# Altium PCB IQDemod.PcbDoc (part 2 of 2)
Units mm, origin at the board's own origin, x right, y up, seen from the top; angles counter-clockwise.
Board outline 91.45 x 68.67 mm, 4 copper layers (Top Layer, Layer 1, Layer 2, Bottom Layer), stack 1.586 mm thick; 81 components, 32 nets, 226 pads, 413 vias.
Unrouted connection lines stored in the file: 58.
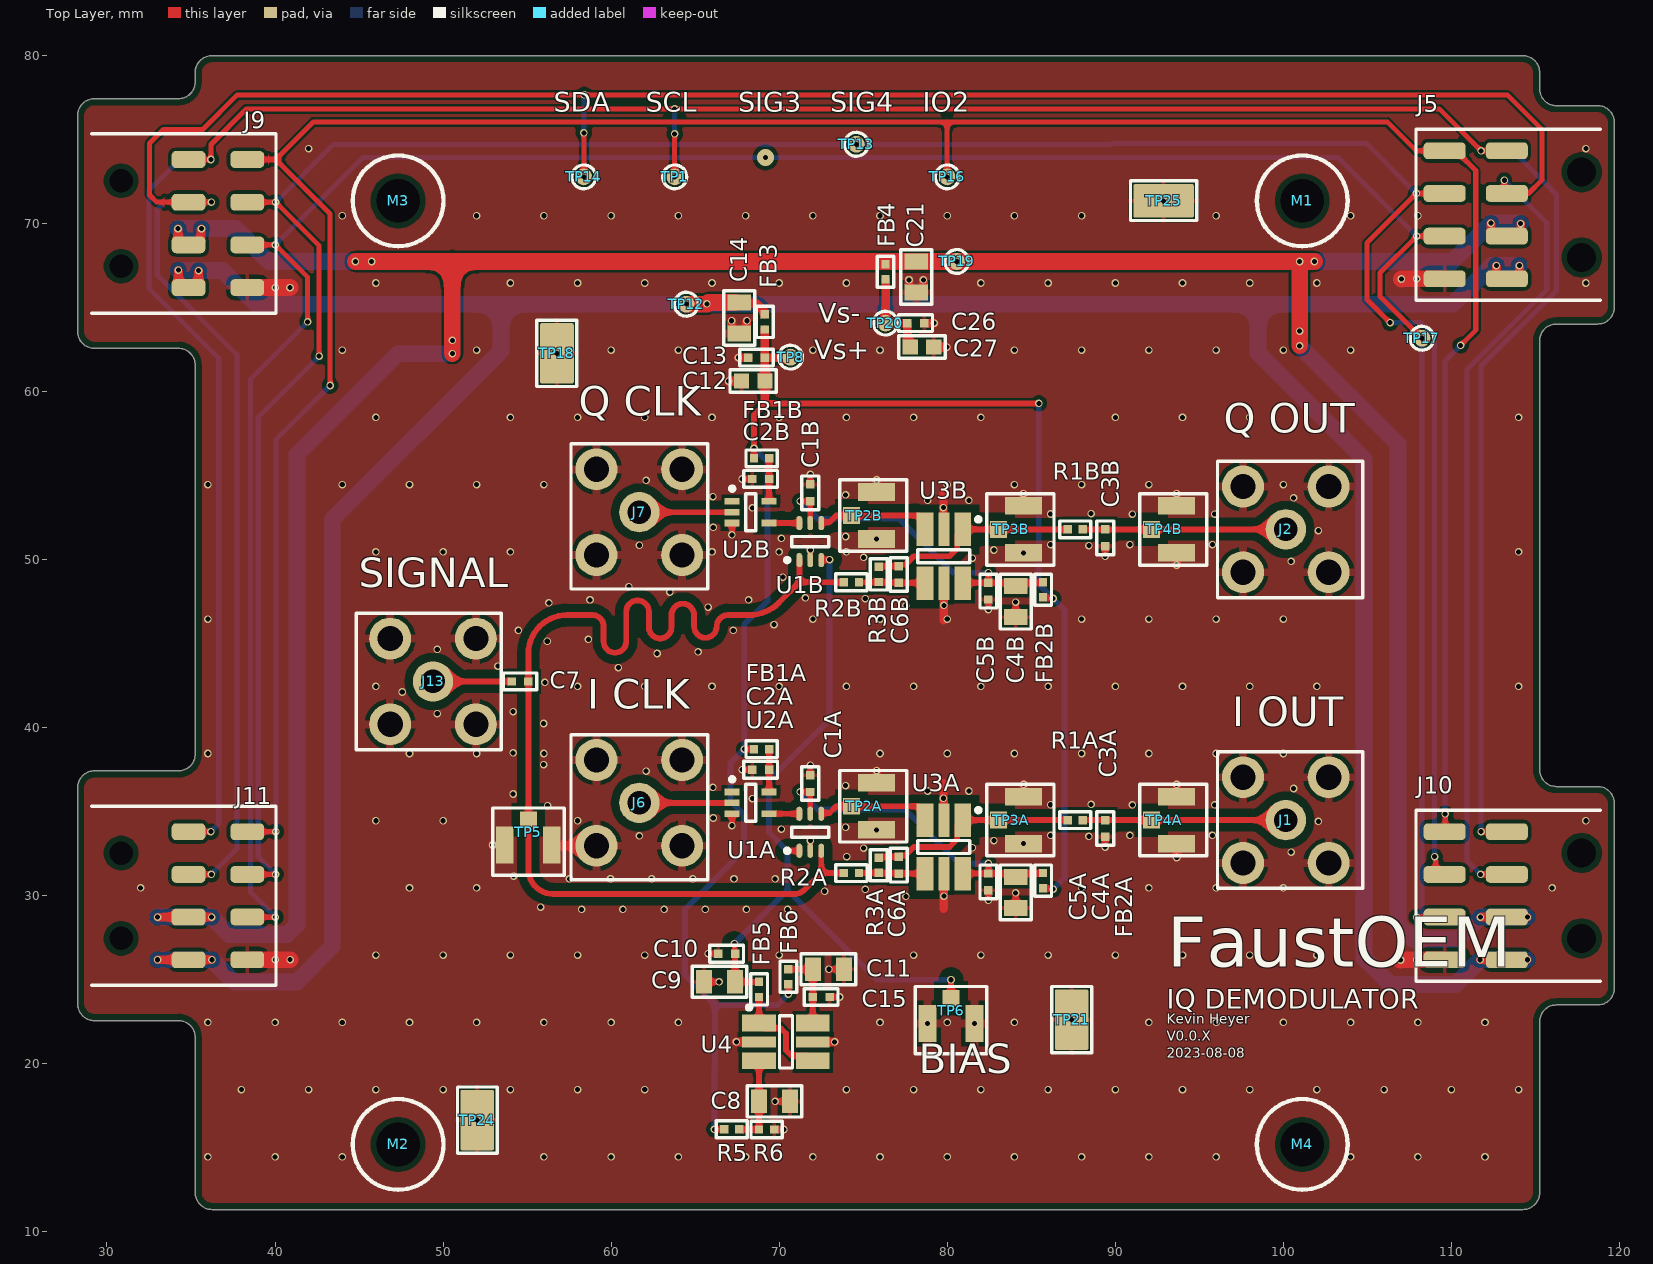
[diagram p0: Top Layer view]

## Via types
v1: diameter 0.45, hole 0.3, Top Layer to Bottom Layer, tented both sides, 412 vias
v2: diameter 1/0.45 (per signal layer), hole 0.3, Top Layer to Bottom Layer, tented bottom, 1 vias

## Nets (pads, with @x,y where several pads share a name; then routed paths per layer and width w, separated by ;. In a path a pad name is that pad's centre, name@x,y a point inside that pad or via, vN(x,y) a via of type N, cw(c..) or ccw(c..) an arc to the next point about the centre after c; other vN are vias at no path point) (continued)
CLK_SDA: (continued)
  Top Layer w0.3: J11.2@34.651,31.27 v1(36.212,31.27) ; v1(36.212,71.27) 34.651,71.27 32.955,71.27 32.525,71.7 32.525,74.775 33.35,75.6 35.7,75.6 37.755,77.655 v1(58.398,77.655) 113.329,77.655 115.4,75.584 115.4,72.6 114.59,71.79 113.1,71.79 113.15,71.84 v1(113.15,72.575) ; v1(58.375,72.775) v1(58.375,75.392) ; v1(111.739,31.27) 113.1,31.27 J10.2
  Bottom Layer w0.3: v1(36.212,31.27) 37.725,32.783 37.725,62.2 32.991,66.934 32.991,70.841 33.42,71.27 v1(36.212,71.27) ; v1(58.375,75.392) 58.375,77.633 v1(58.398,77.655) ; v1(111.739,31.27) 110.925,32.084 110.925,61.311 115.675,66.061 115.675,70.05 v1(113.15,72.575)
GND: C1A.2 C1B.2 C2A.2 C2B.2 C3A.1 C3B.1 C4A.1 C4B.1 C5A.2 C5B.2 C8.1 C9.1 C10.2 C11.1 C12.1 C13.1 C14.1 C15.2 C21.1 C26.1 C27.1 J1.0 J2.0 J5.8 J6.0 J7.0 J9.8 J10.8 J11.8 J13.0 R6.1 TP2A.0 TP2B.0 TP3A.0 TP3B.0 TP4A.0 TP4B.0 TP5.0 TP6.0 TP18.1 TP21.1 TP24.1 TP25.1 U1A.2 U1B.2 U2A.3 U2B.3 U3A.2 U3A.5 U3B.2 U3B.5 U4.2 U4.5 | length 55.9
  Top Layer w0.345: C9.1 v1(66.421,24.875) ; v1(65.775,26.55) C10.2 ; v1(67.189,34.175) 67.195,34.18 67.195,34.87 U2A.3 ; v1(67.189,51.475) 67.195,51.48 67.195,52.17 U2B.3 ; v1(67.45,21.3) U4.2 ; v1(67.8,37.5) C2A.2 ; v1(67.8,54.8) C2B.2 ; R6.1 v1(70.275,16.091) ; v1(69.754,17.76) C8.1 ; U1A.2 v1(71.85,33.275) ; C1A.2 v1(71.85,37.775) ; U1B.2 v1(71.85,50.575) ; C1B.2 v1(71.85,55.075) ; U4.5 v1(73.3,21.3) ; v1(72.954,25.625) C11.1@73.85,25.625 ; C15.2 v1(73.6,23.975) ; v1(79.775,35.8) v1@79.787,35.788 ; v1(79.775,53.1) 79.787,53.088 79.787,51.812 U3B.2 ; U3A.2@79.787,34.512 U3A.2 ; v1(79.8,47.275) U3B.5 ; v1(82.45,29.725) C5A.2 ; v1(82.45,47.025) C5B.2 ; C4A.1 v1(84.075,30.171) ; C4B.1 v1(84.075,47.471) ; v1(89.4,32.9) C3A.1 ; v1(89.4,50.2) C3B.1
  Top Layer w0.5: v1@40.89,26.19 v1(40.899,26.199) ; v1(52.95,33.021) TP5.0@53.768,33.021 ; TP5.0@56.475,33.021 56.521,32.975 J6.0@59.125,32.975 ; v1(66.996,60.625) C12.1 ; v1(67.171,64.216) 67.171,63.675 67.396,63.45 67.841,63.45 68.066,63.675 68.066,64.211 v1(68.071,64.216) ; v1(67.45,21.3) U4.2@68.337,21.3 ; v1(67.571,62.025) C13.1 ; U4.5@72.413,21.3 v1(73.3,21.3) ; TP2A.0@75.8,36.632 v1(75.8,37.45) ; TP2B.0@75.8,53.932 v1(75.8,54.75) ; v1(77.725,66.65) 77.725,66.117 77.95,65.892 C21.1 78.35,65.892 78.575,66.117 v1(78.575,66.65) ; C26.1 v1(79.225,64.075) ; C27.1 v1(79.975,62.65) ; 79.775,29.225 79.8,29.25 v1(79.8,29.975) U3A.5 ; v1(79.775,35.8) 79.775,36.687 ; U3B.2@79.775,52.213 v1(79.775,53.1) 79.775,53.987 ; U3A.2@79.787,34.512 v1@79.787,35.788 ; v1@79.8,46.388 v1(79.8,47.275) U3B.5@79.8,48.162 ; v1(84.529,53.925) 84.529,53.128 TP3B.0@84.55,53.107 ; TP3A.0@84.55,35.807 v1(84.55,36.625) ; TP4A.0@93.65,33.1 93.657,33.093 v1(93.657,32.275) ; TP4A.0@93.65,35.807 v1(93.65,36.625) ; v1(93.65,49.675) TP4B.0@93.65,50.493 ; TP4B.0@93.65,53.107 v1(93.65,53.925)
  Top Layer w1: J11.8 v1@40.89,26.19 ; J9.8 v1(40.022,66.19) v1(40.89,66.19) ; v1(106.975,26.175) 106.99,26.19 J10.8 ; v1(107.025,66.7) 107.035,66.71 J5.8
  other v1: 36,14.463 40,14.463 44,14.463 56,14.463 60,14.463 64,14.463 68,14.463 72,14.463 76,14.463 80,14.463 84,14.463 88,14.463 92,14.463 96,14.463 104,14.463 108,14.463 112,14.463 52.025,16.65 38,18.463 42,18.463 46,18.463 50,18.463 54,18.463 58,18.463 62,18.463 74,18.463 78,18.463 82,18.463 86,18.463 90,18.463 94,18.463 98,18.463 102,18.463 106,18.463 110,18.463 114,18.463 78.825,22.4 81.625,22.4 36,22.463 40,22.463 44,22.463 48,22.463 52,22.463 56,22.463 60,22.463 64,22.463 76,22.463 80,22.463 84,22.463 92,22.463 96,22.463 100,22.463 104,22.463 108,22.463 112,22.463 87.4,22.625 40.022,26.19 107.929,26.19 46,26.463 50,26.463 54,26.463 58,26.463 62,26.463 70,26.463 78,26.463 82,26.463 86,26.463 90,26.463 94,26.463 98,26.463 102,26.463 58.249,29.193 60.699,29.193 63.149,29.193 65.599,29.193 68.049,29.193 70.499,29.193 55.802,29.316 77.532,29.957 72.701,30.268 75.12,30.385 32,30.463 48,30.463 52,30.463 88,30.463 92,30.463 96,30.463 100,30.463 116,30.463 57.512,31.007 59.962,31.007 62.412,31.007 64.862,31.007 67.312,31.007 69.762,31.007 54.201,31.17 74.021,32.331 100.459,32.593 75.021,32.833 81.489,32.856 84.55,33.1 82.775,33.275 88.423,33.532 61.684,33.557 86.15,33.596 90.872,33.593 95.772,33.593 75.8,33.925 70.132,33.968 73.95,34.075 102.085,34.425 46,34.463 50,34.463 58,34.463 118,34.463 66.075,34.625 56.219,35.36 91.011,35.407 95.911,35.407 86.15,35.415 88.561,35.437 68.409,35.78 54.168,36.053 78.836,36.231 81.286,36.231 100.609,36.38 66.05,36.45 73.957,36.556 62.084,37.419 55.982,37.798 36,38.463 48,38.463 52,38.463 56,38.463 76,38.463 80,38.463 84,38.463 88,38.463 92,38.463 96,38.463 100,38.463 54.168,38.503 55.982,40.248 49.652,40.835 54.168,40.953 47.569,42.125 46,42.463 58,42.463 62,42.463 66,42.463 70,42.463 74,42.463 78,42.463 82,42.463 86,42.463 90,42.463 94,42.463 98,42.463 102,42.463 114,42.463 56.056,42.697 60.43,43.572 53.263,43.657 62.731,44.415 65.179,44.509 49.652,44.665 56.199,45.143 58.646,45.251 54.478,45.785 67.266,45.793 69.692,46.131 36,46.463 72,46.463 76,46.463 80,46.463 88,46.463 92,46.463 96,46.463 100,46.463 65.768,47.176 77.532,47.257 56.298,47.425 58.742,47.607 68.179,47.607 75.12,47.685 71.555,47.722 63.489,48.075 61.06,48.399 70.224,48.957 100.459,49.893 81.491,50.092 75.021,50.133 84.55,50.4 46,50.463 50,50.463 54,50.463 66,50.463 70,50.463 74,50.463 114,50.463 82.775,50.575 88.423,50.832 61.684,50.857 86.15,50.896 90.872,50.893 95.772,50.893 75.8,51.225 70.132,51.268 73.95,51.375 102.085,51.725 66.075,51.925 91.011,52.707 95.911,52.707 86.15,52.715 88.561,52.737 68.409,53.08 78.836,53.531 81.286,53.531 100.609,53.68 66.05,53.75 73.957,53.856 36,54.463 44,54.463 48,54.463 52,54.463 56,54.463 80,54.463 84,54.463 88,54.463 92,54.463 100,54.463 62.084,54.719 46,58.463 54,58.463 58,58.463 62,58.463 66,58.463 70,58.463 74,58.463 78,58.463 82,58.463 90,58.463 94,58.463 98,58.463 114,58.463 56.775,62.275 44,62.463 52,62.463 60,62.463 64,62.463 72,62.463 76,62.463 84,62.463 88,62.463 92,62.463 96,62.463 100,62.463 104,62.463 46,66.463 54,66.463 58,66.463 62,66.463 66,66.463 70,66.463 74,66.463 82,66.463 86,66.463 90,66.463 94,66.463 98,66.463 102,66.463 118,66.463 107.929,66.71 44,70.463 52,70.463 56,70.463 60,70.463 64,70.463 68,70.463 72,70.463 76,70.463 80,70.463 84,70.463 88,70.463 96,70.463 104,70.463 108,70.463 92.875,71.35 42,74.463 118,74.463
INV_PWRA: C2A.1 FB1A.1 U2A.5 | length 2.5
  Top Layer w0.345: U2A.5 C2A.1 FB1A.1
INV_PWRB: C2B.1 FB1B.1 U2B.5 | length 2.5
  Top Layer w0.345: U2B.5 C2B.1 FB1B.1
IO2: J5.5 J9.5 J10.5 J11.5 TP16.1 | length 163.3
  Top Layer w0.3: J11.5 v1(40.044,33.81) ; J9.5 40.044,73.81 ; v1(43.275,60.361) 43.275,70.579 40.044,73.81 ; TP16.1 v1(79.997,72.775) 79.997,76.05 ; J10.5 109.629,33.837 v1(109.629,34.875) ; J5.5@109.859,74.33 J5.5 ; v1(110.55,62.75) 110.55,62.755 111.45,63.655 111.45,73.15 110.702,73.898 110.702,73.926 110.297,74.33 J5.5 ; 40.044,73.81 42.284,76.05 79.997,76.05 ; 79.997,76.05 106.187,76.05 107.907,74.33 J5.5
  Bottom Layer w0.3: v1(40.044,33.81) 40.044,57.13 v1(43.275,60.361) ; v1(109.629,34.875) 109.625,34.879 109.625,61.825 v1(110.55,62.75)
ISIGNAL: C7.1 J13.1 | length 4.7
  Top Layer w0.345: J13.1 C7.1
ISIGNAL_AC: C7.2 R2A.2 R2B.2 TP5.1 U1A.3 U1B.1 | length 65.9
  Top Layer w0.345: U1B.1 71.2,48.65 ; U1A.3 72.5,31.35 ; R2A.2 72.5,31.35 ; R2B.2 71.2,48.65 ; 71.2,48.65 69.994,47.444 cw(c68.198,49.24) 68.198,46.7 67.849,46.7 66.952,46.7 ccw(c66.952,46.027) 66.28,46.027 cw(c65.607,46.027) 64.935,46.027 64.935,46.7 ccw(c64.262,46.7) 63.589,46.7 63.589,45.981 cw(c62.917,45.981) 62.244,45.981 62.244,46.904 ccw(c61.571,46.904) 60.899,46.904 60.899,45.135 cw(c60.226,45.135) 59.554,45.135 59.554,46.027 ccw(c58.881,46.027) 58.881,46.7 57.363,46.7 ccw(c57.363,44.412) 55.075,44.412 C7.2 TP5.1 55.075,31.575 ccw(c56.55,31.575) 56.55,30.1 70.55,30.1 70.875,30.1 ccw(c70.875,31.005) 71.515,30.365 72.5,31.35
nSELECTA: U1A.6 U2A.4 | length 1.8
  Top Layer w0.345: U2A.4 U1A.6
nSELECTB: U1B.6 U2B.4 | length 1.8
  Top Layer w0.345: U2B.4 U1B.6
OP-A: C6A.2 R2A.1 R3A.2 U3A.4 | length 4
  Top Layer w0.345: R2A.1 74.759,31.359 75.891,31.359 R3A.2@75.904,31.346 ; R3A.2 R3A.2@75.904,31.346 ; U3A.4 78.657,31.317 C6A.2 77.092,31.342 75.943,31.342 75.925,31.325 R3A.2@75.904,31.346
OP-B: C6B.2 R2B.1 R3B.2 U3B.4 | length 4
  Top Layer w0.345: R2B.1 74.759,48.659 75.891,48.659 R3B.2@75.904,48.646 ; R3B.2 R3B.2@75.904,48.646 ; U3B.4 78.657,48.617 C6B.2 77.092,48.642 75.943,48.642 75.925,48.625 R3B.2@75.904,48.646
OP_OUT_A: C6A.1 R1A.2 R3A.1 TP3A.1 U3A.1 | length 12.6
  Top Layer w0.345: R3A.1@75.925,32.317 C6A.1 77.194,32.395 77.508,32.395 78.014,32.9 80.128,32.9 80.598,33.369 80.598,34.173 U3A.1 R1A.2
OP_OUT_B: C6B.1 R1B.2 R3B.1 TP3B.1 U3B.1 | length 12.6
  Top Layer w0.345: R3B.1@75.925,49.617 C6B.1 77.194,49.695 77.508,49.695 78.014,50.2 80.128,50.2 80.598,50.669 80.598,51.473 U3B.1 R1B.2
OPAMP_PWR: C11.2 C15.1 FB6.1 U4.6 | length 4.6
  Top Layer w0.345: FB6.1 C11.2 C15.1 U4.6
OPAMP_PWRA: C1A.1 C4A.2 C5A.1 FB2A.1 U1A.5 U3A.6 | length 20.3
  Top Layer w0.345: v1@71.251,36.176 C1A.1 ; U1A.5 C1A.1 ; U3A.6 80.95,31.325 C5A.1 ; v1(82.45,31.925) C5A.1 ; 83.05,31.322 83.048,31.323 ; FB2A.1 85.673,31.323 83.048,31.323 ; C5A.1 82.452,31.323 83.048,31.323
  Bottom Layer w0.345: v1(71.25,36.176) 72.291,35.135 77.49,35.135 80.7,31.925 v1(82.45,31.925)
OPAMP_PWRB: C1B.1 C4B.2 C5B.1 FB2B.1 U1B.5 U3B.6 | length 20.3
  Top Layer w0.345: v1@71.251,53.476 C1B.1 ; U1B.5 C1B.1 ; U3B.6 80.95,48.625 C5B.1 ; v1(82.45,49.225) C5B.1 ; 83.05,48.622 83.048,48.623 ; FB2B.1@85.7,48.65 85.673,48.623 83.048,48.623 ; C5B.1 82.452,48.623 83.048,48.623
  Bottom Layer w0.345: v1(71.25,53.476) 72.291,52.435 77.129,52.435 80.339,49.225 v1(82.45,49.225)
OSIG_I: C3A.2 J1.1 R1A.1 TP4A.1 | length 12.1
  Top Layer w0.345: R1A.1 C3A.2 TP4A.1 95.25,34.5 J1.1
OSIG_Q: C3B.2 J2.1 R1B.1 TP4B.1 | length 12.1
  Top Layer w0.345: R1B.1 C3B.2 TP4B.1 95.25,51.8 J2.1
SIG3: J5.7 J9.7 J10.7 J11.7 TP17.1 | length 164.1
  Top Layer w0.3: J11.7 v1(40.02,28.73) ; J9.7 v1(40.02,68.73) 41.939,66.811 v1(41.939,64.147) ; v1(107.931,28.73) J10.7 ; v1(108.25,63.175) 105.75,65.675 105.75,67.069 v1(107.931,69.25) J5.7
  Bottom Layer w0.3: v1(40.02,28.73) 38.55,30.2 38.55,60.759 v1(41.939,64.147) ; v1(40.02,68.73) 45.214,73.925 v2(69.188,73.925) 103.256,73.925 v1(107.931,69.25) ; v1(107.931,28.73) 107.931,28.771 108.25,29.089 v1(108.25,63.175)
SIG4: J5.6 J9.6 J10.6 J11.6 TP13.1 | length 163.5
  Top Layer w0.3: J11.6 v1(40.035,31.27) ; J9.6 v1(40.035,71.27) 42.625,68.68 v1(42.625,62.109) ; v1(106.35,64.1) 104.975,65.475 104.975,68.849 v1(107.916,71.79) J5.6 ; v1(109,32.325) 109,32.284 109.063,32.222 109.063,31.612 109.405,31.27 J10.6
  Bottom Layer w0.3: v1(40.035,31.27) 39,32.305 39,58.484 v1(42.625,62.109) ; v1(40.035,71.27) 43.465,74.7 74.579,74.7 v1(74.594,74.715) 89.753,74.715 89.813,74.775 104.931,74.775 v1(107.916,71.79) ; v1(106.35,64.1) 108.215,64.1 109,63.315 v1(109,32.325)
SWITCH_OUTA: TP2A.1 U1A.4 U3A.3 | length 7
  Top Layer w0.345: U1A.4 72.5,34.923 72.502,34.925 72.99,34.925 73.39,35.325 78.348,35.325 78.675,34.998 U3A.3
SWITCH_OUTB: TP2B.1 U1B.4 U3B.3 | length 7
  Top Layer w0.345: U1B.4 72.5,52.223 72.502,52.225 72.99,52.225 73.39,52.625 78.348,52.625 78.675,52.298 U3B.3
Vbias: C9.2 C10.1 FB5.1 TP6.1 U1A.1 U1B.3 | length 44.1
  Top Layer w0.345: v1(67.33,27.15) 67.35,27.13 67.35,26.575 C10.1 C9.2 FB5.1 ; v1(70.5,32.662) 70.506,32.669 71.198,32.669 71.2,32.671 U1A.1 ; U1B.3 72.5,49.985 72.502,49.987 72.987,49.987 v1(73,50) ; TP6.1 v1(80.225,25)
  Bottom Layer w0.345: v1(67.33,27.15) 70.5,30.32 ; v1(73,50) 73,40.475 69.4,36.875 69.4,33.762 v1(70.5,32.662) 70.5,30.32 ; v1(80.225,25) 75.82,25 70.5,30.32
Vs+: C12.2 C13.2 FB1A.2 FB1B.2 FB2A.2 FB2B.2 FB3.1 FB6.2 R5.2 TP8.1 | length 107.5
  Top Layer w0.345: v1(66.15,16.1) R5.2 ; v1(67.925,38.725) FB1A.2 ; FB1B.2 v1(68.5,56.625) 68.5,58.604 69.15,59.254 ; 69.15,59.3 v1(85.45,59.3) ; v1(70.55,24.15) FB6.2 ; FB2A.2 85.741,30.409 86.28,30.409 v1(86.3,30.389) ; FB2B.2 85.741,47.709 86.28,47.709 v1(86.3,47.689)
  Top Layer w0.5: 69.15,59.25 69.15,59.254 C13.2 ; FB3.1 C13.2 ; TP8.1 cw(c70.65,62.05) 70.65,62.025 C13.2
  Bottom Layer w0.345: v1(66.15,16.1) 66.15,19.802 66.175,19.827 66.175,23.5 ; v1(68.5,56.625) 69.302,55.823 69.302,47.527 67.925,46.15 v1(67.925,38.725) 67.111,37.911 67.111,35.61 67.904,34.817 67.904,32.704 64.4,29.2 64.4,25.275 66.175,23.5 ; v1(70.55,24.15) 69.9,23.5 66.175,23.5 ; v1(85.45,59.3) 85.45,48.539 v1(86.3,47.689) 86.975,47.014 86.975,31.064 v1(86.3,30.389)
Vs-: C26.2 C27.2 FB4.1 TP20.1 | length 5.4
  Top Layer w0.5: C27.2 77.625,62.825 C26.2 TP20.1 76.333,64.083 76.333,66.667 FB4.1 ; FB4.1 76.333,66.683 FB4.1
Vsin+: C14.2 FB3.2 J5.4 J9.4 J10.4 J11.4 TP12.1 | length 205
  Top Layer w0.5: v1(33.01,26.19) 34.651,26.19 v1(36.235,26.19) ; v1(34.25,67.225) 34.25,66.44 34.5,66.19 35.2,66.19 35.45,66.44 v1(35.45,67.2) ; C14.2 67.666,65.25 68.641,65.25 69.15,64.741 FB3.2 ; v1(111.716,26.19) 113.1,26.19 v1(114.517,26.19) ; v1(112.675,67.5) 112.675,66.96 112.925,66.71 113.8,66.71 114.05,66.96 v1(114.05,67.5)
  Top Layer w1: v1(64.471,65.2) 65.683,65.2 v1(65.7,65.217) 65.78,65.297 C14.2@67.416,65.297
  Bottom Layer w0.5: 84.1,65.067 84.233,65.2
  Bottom Layer w1: v1(33.01,26.19) v1(36.235,26.19) 37.55,24.875 41.3,24.875 43.4,26.975 43.4,52.375 53.45,62.425 53.45,65.2 ; v1(34.25,67.225) 35.425,67.225 v1(35.45,67.2) 36.875,67.2 38.875,65.2 53.45,65.2 ; v1(114.05,67.5) 112.388,67.5 111.598,66.71 110.088,65.2 98.5,65.2 ; v1(114.517,26.19) v1(111.716,26.19) 110.251,24.725 106.375,24.725 104.8,26.3 104.8,56 98.5,62.3 98.5,65.2 ; 53.45,65.2 v1(64.471,65.2) 65.683,65.2 v1(65.7,65.217) 65.716,65.2 84.233,65.2 98.5,65.2
Vsin-: C21.2 FB4.2 J5.3 J9.3 J10.3 J11.3 TP19.1 | length 201.8
  Top Layer w0.5: v1(33.01,28.73) 34.651,28.73 v1(36.221,28.73) ; v1(34.225,69.7) 34.225,68.98 34.475,68.73 35.351,68.73 35.601,68.98 35.601,69.676 v1(35.625,69.7) ; v1(111.73,28.73) 113.1,28.73 v1(114.517,28.73) ; v1(112.35,70.025) 112.35,69.5 112.6,69.25 113.875,69.25 114.125,69.5 v1(114.125,70)
  Top Layer w1: v1(44.781,67.742) v1(45.746,67.742) 50.55,67.742 ; v1(50.55,62.256) v1(50.55,63.05) 50.55,67.742 ; v1(100.975,62.726) v1(100.975,63.6) v1(100.975,67.742) ; v1(101.85,67.742) v1(100.975,67.742) ; 50.55,67.742 76.325,67.742 76.341,67.742 C21.2 v1(80.565,67.742) v1(100.975,67.742)
  Bottom Layer w1: v1(33.01,28.73) v1(36.221,28.73) 37.251,27.7 40.714,27.7 41.3,28.286 41.3,56.25 47.306,62.256 v1(50.55,62.256) v1(50.55,63.05) ; v1(34.225,69.7) 37.665,69.7 39.623,67.742 v1(45.746,67.742) ; v1(100.975,63.6) v1(100.975,62.726) 106.825,56.876 106.825,28.3 107.7,27.425 110.425,27.425 v1(111.73,28.73) v1(114.517,28.73) ; v1(100.975,67.742) v1(101.85,67.742) 110.067,67.742 v1(112.35,70.025) 114.1,70.025 v1(114.125,70)
pads on no net: J5.0 J9.0 J10.0 J11.0 M1.1 M2.1 M3.1 M4.1 U2A.1 U2B.1

## Polygon pours and split planes (outlines as drawn)
GND on Top Layer "NONET_L-01_P-001" (solid, pour order 7): 29.25,22.57 cw(c29.25,23.57) 28.25,23.57 28.25,36.43 cw(c29.25,36.43) 29.25,37.43 34.25,37.43 ccw(c34.25,38.43) 35.25,38.43 35.25,61.57 ccw(c34.25,61.57) 34.25,62.57 29.25,62.57 cw(c29.25,63.57) 28.25,63.57 28.25,76.43 cw(c29.25,76.43) 29.25,77.43 34.25,77.43 ccw(c34.25,78.43) 35.25,78.43 35.25,78.994 cw(c36.25,78.994) 36.25,79.994 114.231,79.994 114.25,79.994 cw(c114.25,78.994) 115.25,78.994 115.25,78.02 ccw(c116.25,78.02) 116.25,77.02 118.701,77.02 cw(c118.701,76.02) 119.701,76.02 119.701,65.02 cw(c118.701,65.02) 118.701,64.02 116.25,64.02 ccw(c116.25,63.02) 115.25,63.02 115.25,37.5 ccw(c116.25,37.5) 116.25,36.5 118.701,36.5 cw(c118.701,35.5) 119.701,35.5 119.701,24.5 cw(c118.701,24.5) 118.701,23.5 116.25,23.5 ccw(c116.25,22.5) 115.25,22.5 115.25,0.994 cw(c114.25,0.994) 114.25,-0.006 36.25,-0.006 cw(c36.25,0.994) 35.25,0.994 35.25,21.57 ccw(c34.25,21.57) 34.25,22.57
GND on Top Layer "Top Layer-GND" (solid, pour order 6): 603 vertices, not listed, extent 47.235,28.955 75.063,51.365
GND on Top Layer "Top Layer-GND 1" (solid, pour order 5): 449 vertices, not listed, extent 59.509,46.637 102.315,54.99
GND on Top Layer "Top Layer-GND 2" (solid, pour order 4): 449 vertices, not listed, extent 59.509,29.337 102.315,37.69
GND on Bottom Layer "NONET_L-01_P-001" (solid, pour order 8): 29.25,22.57 cw(c29.25,23.57) 28.25,23.57 28.25,36.43 cw(c29.25,36.43) 29.25,37.43 34.25,37.43 ccw(c34.25,38.43) 35.25,38.43 35.25,61.57 ccw(c34.25,61.57) 34.25,62.57 29.25,62.57 cw(c29.25,63.57) 28.25,63.57 28.25,76.43 cw(c29.25,76.43) 29.25,77.43 34.25,77.43 ccw(c34.25,78.43) 35.25,78.43 35.25,78.994 cw(c36.25,78.994) 36.25,79.994 114.231,79.994 114.25,79.994 cw(c114.25,78.994) 115.25,78.994 115.25,78.02 ccw(c116.25,78.02) 116.25,77.02 118.701,77.02 cw(c118.701,76.02) 119.701,76.02 119.701,65.02 cw(c118.701,65.02) 118.701,64.02 116.25,64.02 ccw(c116.25,63.02) 115.25,63.02 115.25,37.5 ccw(c116.25,37.5) 116.25,36.5 118.701,36.5 cw(c118.701,35.5) 119.701,35.5 119.701,24.5 cw(c118.701,24.5) 118.701,23.5 116.25,23.5 ccw(c116.25,22.5) 115.25,22.5 115.25,0.994 cw(c114.25,0.994) 114.25,-0.006 36.25,-0.006 cw(c36.25,0.994) 35.25,0.994 35.25,21.57 ccw(c34.25,21.57) 34.25,22.57
GND on Layer 2 (split plane): 327 vertices, not listed, extent 28.759,11.836 119.191,79.485
GND on Layer 1 (split plane): 327 vertices, not listed, extent 28.759,11.836 119.191,79.485

## Other copper
Layer 1 (plane layer: these items are gaps in the copper):
  lines w0.254: 102.085,34.425 102.085,37.05 102.7,37.05
Layer 2 (plane layer: these items are gaps in the copper):
  lines w0.254: 102.085,34.425 102.085,37.05 102.7,37.05

## Silkscreen, mask and mechanical layers (free items; w line width, h text height)
Top Overlay:
  text "SDA" at 56.575,76.267 h2
  text "SCL" at 62.065,76.267 h2
  text "SIG3" at 67.556,76.267 h2
  text "SIG4" at 73.046,76.267 h2
  text "IO2" at 78.537,76.267 h2
  text "Vs-" at 72.325,63.717 h2
  text "Vs+" at 72.075,61.542 h2
  text "Q CLK" at 58.062,57.969 h3
  text "Q OUT" at 96.449,56.944 h3
  text "SIGNAL" at 44.976,47.75 h3
  text "I CLK" at 58.573,40.525 h3
  text "I OUT" at 96.96,39.5 h3
  text "FaustOEM" at 93.1,24.8 h5.08
  text "IQ DEMODULATOR" at 93.075,22.875 h2
  text "Kevin Heyer / V0.0.X / 2023-08-08" at 93.075,20.159 h1
  text "BIAS" at 78.3,18.854 h3
Bottom 3D Body Top/3D Body Bot:
  lines w0.2: 163.531,4.466 163.531,78.929 ; 0,0 0,74.463 100,74.463 100,0 0,0
Board:
  lines w0.2: 114.231,79.994 36.25,79.994 ccw(c36.25,78.994) 35.25,78.994 35.25,78.43 cw(c34.25,78.43) 34.25,77.43 29.25,77.43 ccw(c29.25,76.43) 28.25,76.43 28.25,70 28.25,63.57 ccw(c29.25,63.57) 29.25,62.57 34.25,62.57 cw(c34.25,61.57) 35.25,61.57 35.25,38.43 cw(c34.25,38.43) 34.25,37.43 29.25,37.43 ccw(c29.25,36.43) 28.25,36.43 28.25,30 28.25,23.57 ccw(c29.25,23.57) 29.25,22.57 34.25,22.57 cw(c34.25,21.57) 35.25,21.57 35.25,12.327 ccw(c36.25,12.327) 36.25,11.327 114.25,11.327 ccw(c114.25,12.327) 115.25,12.327 115.25,22.5 cw(c116.25,22.5) 116.25,23.5 118.701,23.5 ccw(c118.701,24.5) 119.701,24.5 119.701,30 119.701,35.5 ccw(c118.701,35.5) 118.701,36.5 116.25,36.5 cw(c116.25,37.5) 115.25,37.5 115.25,63.02 cw(c116.25,63.02) 116.25,64.02 118.701,64.02 ccw(c118.701,65.02) 119.701,65.02 119.701,70.52 119.701,76.02 ccw(c118.701,76.02) 118.701,77.02 116.25,77.02 cw(c116.25,78.02) 115.25,78.02 115.25,78.994 ccw(c114.25,78.994) 114.25,79.994 ; 115.25,77.95 115.25,77.959